# Altium PCB Control.PcbDoc
Units mm, origin at the board's own origin, x right, y up, seen from the top; angles counter-clockwise.
Board outline 100 x 50 mm, 2 copper layers (Top Layer, Bottom Layer); 89 components, 65 nets, 264 pads, 30 vias.
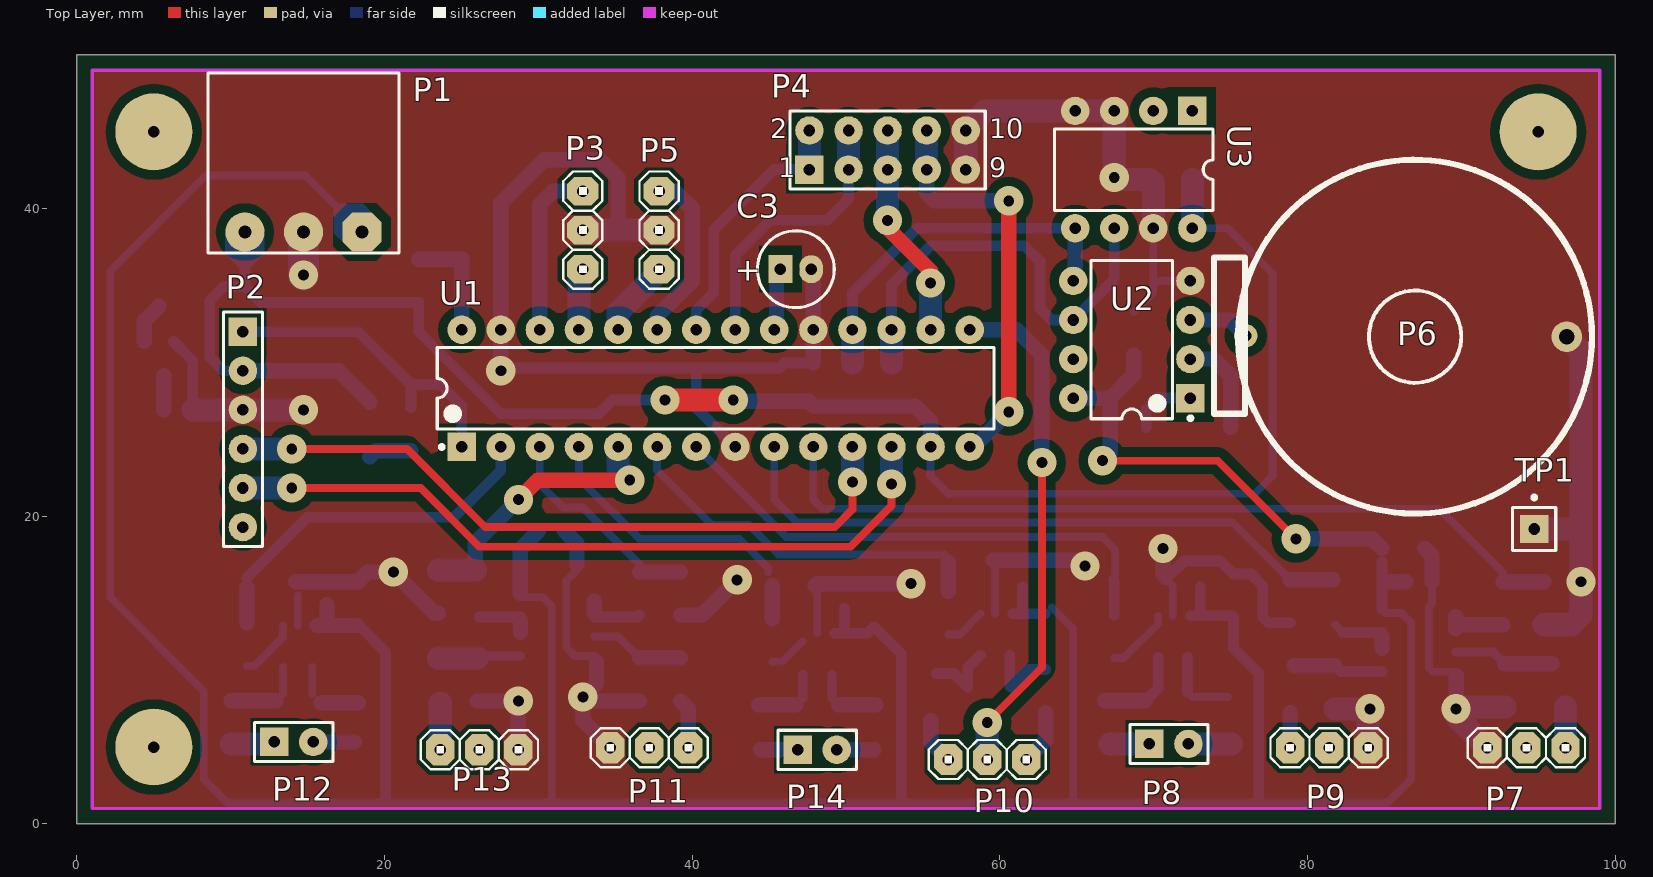
[diagram p0: Top Layer view]
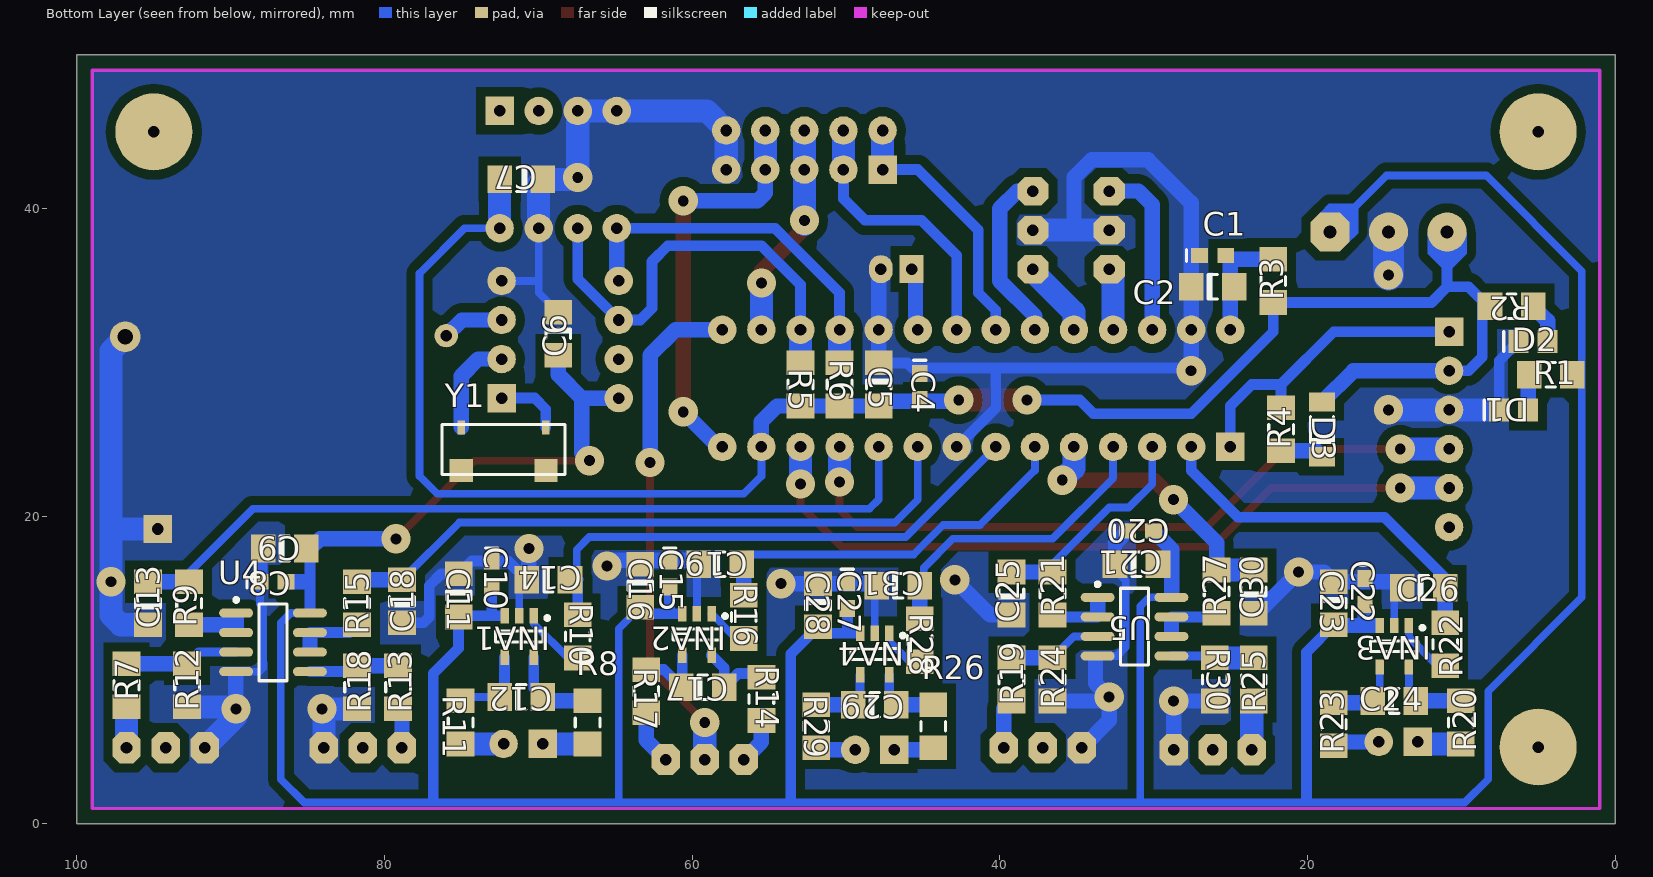
[diagram p1: Bottom Layer view, seen from below]

## Layer stack, top to bottom
Top Solder: solder mask 0.0102, Solder Resist, Dk 3.5
Top Layer: signal copper 0.0356
Dielectric 1: dielectric 0.32, FR-4, Dk 4.8
Bottom Layer: signal copper 0.0356
Bottom Solder: solder mask 0.0102, Solder Resist, Dk 3.5

## Board outline
0,0 100,0 100,50 0,50

## Design rules (kind name [scope] priority, off if disabled: settings)
Clearance "Polygon Clearance" [InPolygon AND (Not(OnLayer('Keep-Out Layer'))) vs All AND (Not(OnLayer('Keep-Out Layer')))] p1: gap=0.6
Clearance [All AND (Not(OnLayer('Keep-Out Layer'))) vs All AND (Not(OnLayer('Keep-Out Layer')))] p2: gap=0.4
ComponentClearance [All] p1 off: gap=0.5 collisioncheckmode=3 verticalgap=0.254 showdistances=TRUE
Height [All] p1: minheight=0 maxheight=15 prefheight=12.7
MinimumSolderMaskSliver SilkscreenOverComponentPads [All] p2: minsoldermaskwidth=0.254
PlaneConnect [All] p1: planeconnectstyle=Relief reliefexpansion=0.508 reliefentries=4 reliefconductorwidth=0.7 reliefairgap=0.6
PolygonConnect [All] p1: connectstyle=Direct reliefconductorwidth=1 reliefentries=4 polygonreliefangle="90 Angle" airgapwidth=0.254
RoutingVias [All] p1: holewidth=0.75 width=1.5 viastyle="Through Hole" minholewidth=0.75 minwidth=1.5 maxholewidth=1.25 maxwidth=3
SolderMaskExpansion [All] p1: expansion=0.102
Width [All] p1: maxlimit=8 minlimit=0.5 preferedwidth=1
27 further rules are at their usual default settings.

## Classes and differential pairs
component class Control: C1 C2 C3 C4 C5 C6 C7 D1 D2 D3 P1 P2 P3 P4 P5 P6 R1 R2 R3 R4 R5 R6 TP1 U1 U2 U3 Y1
component class "Remote Feedback": .7 C8 C9 C10 C11 C12 C13 C14 C15 C16 C17 C18 C19 C20 C21 C22 C23 C24 C25 C26 C27 C28 C29 C30 C31 INA1 INA2 INA3 INA4 P7 P8 P9 P10 P11 P12 P13 P14 R7 R8 R9 R10 R11 R12 R13 R14 R15 R16 R17 R18 R19 R20 R21 R22 R23 R24 R25 R26 R27 R28 R29 R30 U4 U5

## Components (designator, comment, footprint, x,y, rotation, side; value= is the part's Value field where it differs from the comment)
C1 "C0603" 0603 26.162,36.957 r180 bottom
C2 "SMD" 1206 26.162,34.925 r180 bottom
C3 "5mm Cap. 16V" B 46.736,36.068 r0 top
C4 "C0603" 0603 45.212,28.448 r270 bottom
C5 "SMD" 1206 47.879,28.575 r270 bottom
C6 "SMD" 1206 68.707,31.877 r270 bottom
C7 "SMD" 1206 71.12,41.91 r0 bottom
C8 "C0603" 0603 87.249,15.748 r180 bottom
C9 "SMD" 1206 86.487,17.907 r180 bottom
C10 "C0603" 0603 73.025,16.256 r270 bottom
C11 "SMD" 1206 75.184,14.859 r270 bottom
C12 "SMD" 1206 71.12,8.255 r180 bottom
C13 "SMD" 1206 95.377,14.351 r90 bottom
C14 "SMD" 1206 69.342,15.875 r180 bottom
C15 "C0603" 0603 61.468,16.256 r270 bottom
C16 "SMD" 1206 63.373,15.494 r270 bottom
C17 "SMD" 1206 59.309,8.89 r180 bottom
C18 "SMD" 1206 78.867,14.478 r90 bottom
C19 "SMD" 1206 58.166,16.891 r180 bottom
C20 "C0603" 0603 30.861,19.05 r180 bottom
C21 "SMD" 1206 31.115,16.891 r180 bottom
C22 "C0603" 0603 16.256,15.113 r270 bottom
C23 "SMD" 1206 18.288,14.351 r270 bottom
C24 "SMD" 1206 14.351,8.001 r180 bottom
C25 "SMD" 1206 39.243,14.986 r90 bottom
C26 "SMD" 1206 12.446,15.367 r180 bottom
C27 "C0603" 0603 49.911,14.859 r270 bottom
C28 "SMD" 1206 51.816,14.224 r270 bottom
C29 "SMD" 1206 48.133,7.747 r180 bottom
C30 "SMD" 1206 23.495,15.113 r90 bottom
C31 "SMD" 1206 46.609,15.494 r180 bottom
D1 "15-21SURC/S530-A3/TR8" 15-21SURC/S530-A3/TR8 6.604,26.924 r0 bottom
D2 "15-21SURC/S530-A3/TR8" 15-21SURC/S530-A3/TR8 5.334,31.369 r0 bottom
D3 "1N4148" SOD80C 19.05,25.654 r270 bottom
INA1 "INA196" SOT-23-5 71.247,12.192 r270 bottom
INA2 "INA196" SOT-23-5 59.69,12.319 r270 bottom
INA3 "INA196" SOT-23-5 14.351,11.557 r270 bottom
INA4 "INA196" SOT-23-5 48.133,11.049 r270 bottom
P1 "XY2500R-F 3P" "XY2500R-F 3P" 14.732,38.481 r180 top
P2 "ICSP" HDR1X6 10.795,32.004 r270 top
P3 "Header 3" My_1X03 32.893,38.608 r270 top
P4 "Interface" HDR2X5 47.625,42.545 r0 top
P5 "Header 3" My_1X03 37.846,38.608 r270 top
P6 "CR2032 Holder" "Porta Pila Boton 3V" 72.136,46.101 r270 top
P7 "Header 3" My_1X03 94.234,4.953 r0 top
P8 "Header 2" HDR1X2 69.723,5.207 r0 top
P9 "Header 3" My_1X03 81.407,4.953 r180 top
P10 "Header 3" My_1X03 59.182,4.191 r0 top
P11 "Header 3" My_1X03 37.211,4.953 r0 top
P12 "Header 2" HDR1X2 12.827,5.334 r0 top
P13 "Header 3" My_1X03 26.162,4.826 r180 top
P14 "Header 2" HDR1X2 46.863,4.826 r0 top
R1 "SMD" 8RB-1206 4.191,29.21 r0 bottom
R2 "SMD" 8RB-1206 6.731,33.655 r180 bottom
R3 "SMD 1206" 8RB-1206 22.225,35.306 r270 bottom
R4 "SMD 1206" 8RB-1206 21.717,25.654 r90 bottom
R5 "SMD 1206" 8RB-1206 52.959,28.575 r90 bottom
R6 "SMD 1206" 8RB-1206 50.419,28.575 r90 bottom
R7 "SMD" 8RB-1206 96.774,9.017 r270 bottom
R8 "SMD 1206" 8RB-1206 66.802,6.604 r90 bottom
R9 "SMD 1206" 8RB-1206 92.71,14.351 r90 bottom
R10 "SMD 1206" 8RB-1206 67.437,12.192 r90 bottom
R11 "SMD 1206" 8RB-1206 75.057,6.604 r90 bottom
R12 "SMD" 8RB-1206 92.837,9.017 r90 bottom
R13 "SMD" 8RB-1206 79.121,8.89 r270 bottom
R14 "SMD 1206" 8RB-1206 55.499,8.128 r90 bottom
R15 "SMD 1206" 8RB-1206 81.788,14.351 r90 bottom
R16 "SMD 1206" 8RB-1206 56.642,13.462 r90 bottom
R17 "SMD 1206" 8RB-1206 62.992,8.636 r90 bottom
R18 "SMD" 8RB-1206 81.788,8.89 r90 bottom
R19 "SMD" 8RB-1206 39.243,9.398 r270 bottom
R20 "SMD 1206" 8RB-1206 10.033,6.604 r90 bottom
R21 "SMD 1206" 8RB-1206 36.576,14.986 r90 bottom
R22 "SMD 1206" 8RB-1206 11.049,11.684 r90 bottom
R23 "SMD 1206" 8RB-1206 18.288,6.477 r90 bottom
R24 "SMD" 8RB-1206 36.576,9.398 r90 bottom
R25 "SMD" 8RB-1206 23.495,9.398 r270 bottom
R26 "SMD 1206" 8RB-1206 44.323,6.35 r90 bottom
R27 "SMD 1206" 8RB-1206 25.908,15.113 r90 bottom
R28 "SMD 1206" 8RB-1206 45.212,11.938 r90 bottom
R29 "SMD 1206" 8RB-1206 51.943,6.35 r90 bottom
R30 "SMD" 8RB-1206 26.035,9.398 r90 bottom
TP1 "" PIN1 94.742,19.177 r0 top
U1 "DSPIC33FJ16GS402-I/SP" SPDIP300-SP28 41.529,28.321 r90 top
U2 "DS1307" DIP8 68.58,31.496 r180 top
U3 "M24C08BN6" PSDIP8A 68.707,42.545 r180 top
U4 "MCP6002-I/SN" SOIC-SN8_N 87.249,11.811 r180 bottom
U5 "MCP6002-I/SN" SOIC-SN8_N 31.242,12.827 r180 bottom
Y1 "32.768 kHz" MC306-327680K-A0 72.263,24.384 r0 bottom

## Footprints (in the part's own frame and the unit in brackets; to place one, negate y for a bottom-side part, rotate by r counter-clockwise, add the part's x,y. Pads: shape width x height; smd on the part's side, far side on the other; paste and mask are expansions set on the pad)
8RB-1206 [mm] "Chip Resistor; Body 3.2 x 1.6 mm (LxW typ)"
  rect 1.6x1.8 smd: 1(-1.4,0) 2(1.4,0)
  silkscreen extent -0.3,-0.8 0.3,0.8
15-21SURC/S530-A3/TR8 [mm] "15-21SURC/S530-A3/TR8 led smd 0805"
  rect 1.3x1.5 smd: 1(-0.95,0) 2(0.95,0)
  silkscreen extent 1.91,-0.64 1.91,0.67
0603 [mm] "Chip Capacitor; Body 1.6 x 0.8 mm (LxW typ)"
  rect 1.1x1 smd: 1(-0.85,0) 2(0.85,0)
  silkscreen extent -1.7,-0.4 -1.7,0.4
1206 [mm] "Chip Capacitor; Body 3.2 x 1.6 mm (LxW typ)"
  rect 1.6x1.8 smd: 1(-1.4,0) 2(1.4,0)
  silkscreen extent -0.3,-0.8 0.3,0.8
B [mm] "Capacitor, Electrolytic, Radial; Body 5 x 6.8 mm (Dia.xH typ); Pin Spacing 2 mm (typ)"
  rect 1.55x1.825 hole 0.75: 1(-1,0)
  oval 1.55x1.825 hole 0.75: 2(1,0)
  silkscreen extent -2.5,-2.5 2.5,2.5
DIP8 [mm] "DIP, 8-Leads, Row Spacing 7.62mm, Pitch 2.54mm, Body 9.65x6.35mm"
  rect 1.85x1.85 hole 0.75: 1(-3.81,3.81)
  round 1.85 hole 0.75: 2(-3.81,1.27) 3(-3.81,-1.27) 4(-3.81,-3.81) 5(3.81,-3.81) 6(3.81,-1.27) 7(3.81,1.27) 8(3.81,3.81)
  silkscreen extent -3.94,-5.15 2.65,5.23, body extent -3.6,-5.15 3.6,5.15, height 4.42
HDR1X2 [mm] "Connector; Header; 2 Position"
  rect 1.85x1.85 hole 0.75: 1(0,0)
  round 1.85 hole 0.75: 2(2.54,0)
  silkscreen extent -1.27,-1.27 3.81,1.27
HDR1X6 [mm] "Connector; Header; 6 Position"
  rect 1.85x1.85 hole 0.75: 1(0,0)
  round 1.85 hole 0.75: 2(2.54,0) 3(5.08,0) 4(7.62,0) 5(10.16,0) 6(12.7,0)
  silkscreen extent -1.27,-1.27 13.97,1.27
HDR2X5 [mm] "Connector; Header; 5x2 Position"
  rect 1.85x1.85 hole 0.75: 1(0,0)
  round 1.85 hole 0.75: 2(0,2.54) 3(2.54,0) 4(2.54,2.54) 5(5.08,0) 6(5.08,2.54) 7(7.62,0) 8(7.62,2.54) 9(10.16,0) 10(10.16,2.54)
  silkscreen extent -1.27,-1.27 11.43,3.81
MC306-327680K-A0 [mm] "MC306-327680K-A0 - XTAL 32.768 KHZ 12.5pF+-20PPM -20+70ºC SMD"
  rect 0.5x0.9 smd: 1(-2.75,-1.4) 2(2.75,-1.4)
  rect 1.5x1.5 smd: 3(2.75,1.4) 4(-2.75,1.4)
  silkscreen extent -4,-1.6 4,1.65
My_1X03 [mm]
  oct 1.85x2.032 hole 0.75: 1(-2.54,0) 2(0,0) 3(2.54,0)
  silkscreen extent -3.81,-1.27 3.81,1.27
PIN1 [mm] "Connector; Plug"
  rect 1.85x1.85 hole 0.75: 1(0,0)
  silkscreen extent -1.4,-1.4 1.4,2.17
"Porta Pila Boton 3V" [mil] "Porta pila para pilas tipo boton de 25mm"
  round 60 hole 30: +(565,151.93)
  round 78.74 hole 39.37: -(567.76,973.19)
  silkscreen extent 115,70 1020,1038
PSDIP8A [mm] "DIP; 8 Leads; Row Spacing 7.62 mm; Pitch 2.54 mm"
  rect 1.85x1.85 hole 0.75: 1(-3.81,-3.81)
  round 1.85 hole 0.75: 2(-1.27,-3.81) 3(1.27,-3.81) 4(3.81,-3.81) 5(3.81,3.81) 6(1.27,3.81) 7(-1.27,3.81) 8(-3.81,3.81)
  silkscreen extent -5.15,-2.65 5.15,2.65
SOD80C [mm] "Metal Electrode Face (MELF) Diode; Body 3.5 x 1.6 mm (LxDia)"
  rect 1.25x1.7 smd: 1(-1.775,0) 2(1.775,0)
  silkscreen extent -0.85,-0.75 0.85,0.75
SOIC-SN8_N [mm] "SOIC, 8-Leads, Body 4.9x3.8mm, Pitch 1.27mm, IPC Medium Density"
  oval 2.2x0.6 smd: 1(-2.4,1.905) 2(-2.4,0.635) 3(-2.4,-0.635) 4(-2.4,-1.905) 5(2.4,-1.905) 6(2.4,-0.635) 7(2.4,0.635) 8(2.4,1.905)
  silkscreen extent -2.53,-2.5 0.9,2.88, body extent -2,-2.5 2,2.5, height 1.75
SOT-23-5 [mm] "SOT23, 5-Leads, Body 2.9x1.7mm, Pitch 0.95mm, Lead Span 2.8mm, IPC High Density"
  rect 1x0.55 smd: 1(-1.35,0.95) 2(-1.35,0) 3(-1.35,-0.95) 4(1.35,-0.95) 5(1.35,0.95)
  silkscreen extent -1.32,-1.55 0.35,1.95, body extent -0.9,-1.55 0.9,1.55, height 1.45
SPDIP300-SP28 [mm] "DIP, 28-Leads, Row Spacing 7.62mm, Pitch 2.54mm, Body 34.9x6.8mm"
  rect 1.85x1.85 hole 0.75: 1(-3.81,16.51)
  round 1.85 hole 0.75: 2(-3.81,13.97) 3(-3.81,11.43) 4(-3.81,8.89) 5(-3.81,6.35) 6(-3.81,3.81) 7(-3.81,1.27) 8(-3.81,-1.27) 9(-3.81,-3.81) 10(-3.81,-6.35) 11(-3.81,-8.89) 12(-3.81,-11.43) 13(-3.81,-13.97) 14(-3.81,-16.51) 15(3.81,-16.51) 16(3.81,-13.97) 17(3.81,-11.43) 18(3.81,-8.89) 19(3.81,-6.35) 20(3.81,-3.81) 21(3.81,-1.27) 22(3.81,1.27) 23(3.81,3.81) 24(3.81,6.35) 25(3.81,8.89) 26(3.81,11.43) 27(3.81,13.97) 28(3.81,16.51)
  silkscreen extent -3.93,-18.1 2.65,18.1, body extent -3.55,-18.1 3.55,18.1, height 5.08
"XY2500R-F 3P" [mm] "XY2500R-F 3P"
  oct 2.54x2.54 hole 0.85: 1(-3.81,0)
  round 2.54 hole 0.85: 2(0,0) 3(3.81,0)
  silkscreen extent -6.21,-10.35 6.21,1.35

## Part data
C1 C4 C8 C10 C15 C20 C22 C27: "C1608X7R1C105K X7R"
C2 C5 C6 C7 C9 C11 C12 C13 C14 C16 C17 C18 C19 C21 C23 C24 C25 C26 C28 C29 C30 C31: library part C1206, "Ceramic Chip Capacitor - Standard"
C3: library part 94SC106X0010BBP, "Solid Aluminum Capacitor with Organic Semiconductor Electrolyte: 10uF, 10V, Bulk Pack"
D1 D2: library part "15-21SURC/S530-A3/TR8 led smd 0805 red", "15-21SURC/S530-A3/TR8 led smd 0805 red"
D3: "High Conductance Fast Diode"
INA1 INA2 INA3 INA4: "Current Shunt Monitor -16 V to +80 V Common-Mode Range"
P1: "HEADER 3P P/CI 90gra VERDE P=3.81MM XY2500R-F"
P2: library part "Header 6", "Header, 6-Pin"
P3 P5 P7 P9 P10 P11 P13: "Header, 3-Pin"
P4: library part "Header 5X2", "Header, 5-Pin, Dual row"
P6: library part "Porta pila 25mm"
P8 P12 P14: "Header, 2-Pin"
R1 R2 R3 R4 R5 R6 R7 R8 R9 R10 R11 R12 R13 R14 R15 R16 R17 R18 R19 R20 R21 R22 R23 R24 R25 R26 R27 R28 R29 R30: library part ERJ8BQ, "Low Ohmic Value Thick Film Chip Resistor, 0.22 Ohm to 9.1 Ohm Range, 1%, 2% and 5% Tolerance, 1206 Size, 0.33 W"
TP1: library part Plug, "Plug"
U1: "High-Performance 16-bit Digital Signal Controller, 16 KB Flash, 2 KB RAM , 28-Pin SPDIP, Industrial Temperature"
U2: "64 X 8 Serial Real-Time Clock"
U3: "8Kbit Serial I²C Bus EEPROM"
U4 U5: "1 MHz, Low-Power Operational Amplifier, 8-Pin SOIC, Industrial Temperature"
Y1: library part MC306-327680K-A0, "MC306-327680K-A0 - XTAL 32.768 KHZ 12.5pF+-20PPM -20+70ºC SMD"

## Free pads (board coordinates)
  round 5 hole 0.75: 0(5,5) 0(5,45) 0(95,45)

## Via types
v1: diameter 1.9, hole 0.711, Top Layer to Bottom Layer, 30 vias

## Nets (pads, with @x,y where several pads share a name; then routed paths per layer and width w, separated by ;. In a path a pad name is that pad's centre, name@x,y a point inside that pad or via, vN(x,y) a via of type N, cw(c..) or ccw(c..) an arc to the next point about the centre after c; other vN are vias at no path point)
3V3_SENSE_NEG: P8.1 R8.1 | length 2.5
  Bottom Layer w1.5: R8.1@67.18,5.207 P8.1
3V3_SENSE_POS: P8.2 R11.1 | length 2.8
  Bottom Layer w1.5: P8.2@72.266,5.204 R11.1
3V3FEEDBACK: C13.2 R9.2 U1.10 | length 53.5
  Bottom Layer w0.5: U1.10 47.879,21.093 48.477,20.495 88.553,20.495 92.71,16.338 R9.2
  Bottom Layer w1: R9.2 C13.2
5V_CTRL: P10.2 U1.15 | length 33.1
  Top Layer w0.5: v1(59.182,6.604) 62.738,10.16 v1(62.738,23.495)
  Bottom Layer w1: U1.15 61.087,32.131 62.738,30.48 v1(62.738,23.495)
  Bottom Layer w1.5: P10.2 v1(59.182,6.604)
5V_SENSE_NEG: P10.1 R14.1 | length 3
  Bottom Layer w1: R14.1 55.499,5.334 P10.1
5V_SENSE_POS: P10.3 R17.1 | length 3.6
  Bottom Layer w1: P10.3 62.992,5.461 R17.1
5VFEEDBACK: C18.2 R15.2 U1.9 | length 41.9
  Bottom Layer w0.5: U1.9 45.339,21.082 46.826,19.595 75.15,19.595 C18.2
  Bottom Layer w1: C18.2 R15.2@81.661,15.878
+3V3: C4.2 C5.2 C7.2 D3.1 P1.3 P2.2 R2.1 R3.2 R5.1 R6.1 U1.13 U3.8 | length 121.4
  Top Layer w0.5: v1(38.227,27.559) v1@38.481,27.813
  Top Layer w1.5: v1@38.735,27.559 v1(42.672,27.559)
  Bottom Layer w0.5: v1@42.291,27.686 v1@42.506,27.471 ; U1.13 55.499,22.606 56.642,21.463 76.581,21.463 77.724,22.606 77.724,35.814 74.803,38.735 U3.8 U3.8@72.52,38.738
  Bottom Layer w0.7: P2.2 9.525,29.464 8.636,30.353 8.636,34.036 9.525,34.925 10.922,34.925 ; P1.3 10.922,34.925 ; v1(38.227,27.559) 34.798,27.559 33.909,26.67 27.559,26.67 22.225,32.004 R3.2 11.941,33.906 10.922,34.925
  Bottom Layer w1: P2.2 17.015,29.464 D3.1 ; v1@42.506,27.471 47.583,27.471 C5.2 R6.1 54.486,27.175 55.499,26.162 U1.13
  Bottom Layer w1.5: U3.8@72.52,38.738 C7.2
+3V3_OUT: P7.3 R7.2 | length 2.7
  Bottom Layer w1.5: P7.3 R7.2
+5V: C6.2 C8.2 C9.2 C10.2 C11.2 C15.2 C16.2 C20.2 C21.2 C22.2 C23.2 C27.2 C28.2 INA1.3 INA2.3 INA3.3 INA4.3 P1.1 R1.1 U2.8 U4.8 U5.8 | length 268.2
  Top Layer w0.5: v1(66.675,23.622) 74.168,23.622 v1(79.248,18.542)
  Bottom Layer w0.5: P1.1 14.859,42.164 8.382,42.164 2.159,35.941 2.159,14.732 8.255,8.636 8.255,2.921 9.779,1.397 30.734,1.397 64.643,1.397 ; U5.8 30.279,14.732 30.861,14.15 30.861,1.651 ; C16.2 64.77,12.697 64.77,1.524 64.643,1.397 ; v1(66.675,23.622) v1@67.183,24.13 ; U4.8@85.09,13.716 86.106,13.716 86.741,13.081 86.741,2.921 85.217,1.397 64.643,1.397
  Bottom Layer w0.7: C23.2 20.066,11.173 20.066,1.651 ; INA4.3@49.276,12.399 51.391,12.399 C28.2 53.594,11.046 53.594,1.651 ; 49.911,12.526 C27.2 ; INA2.3@60.833,13.669 C16.2@62.948,13.669 ; 61.468,13.923 C15.2 ; INA1.3@72.39,13.542 73.025,13.542 ; C10.2 73.025,13.542 ; C11.2@75.101,13.542 73.025,13.542 ; C11.2 75.184,11.43 76.835,9.779 76.835,1.651 ; U4.8@84.849,13.957 C9.2@84.849,17.034
  Bottom Layer w1: 15.621,12.907 C23.2@18.244,12.907 ; 16.256,13.161 C22.2 ; U5.8@28.829,14.986 28.829,17.868 C20.2 ; U2.8 67.183,27.686 ; v1@67.183,24.13 67.183,27.686 ; C6.2 68.707,29.21 67.183,27.686 ; v1(79.248,18.542) 84.198,18.542 C9.2@84.833,17.907 ; 84.976,15.748 C8.2
+5V_OUT: P9.3 R13.2 | length 2.3
  Bottom Layer w1: P9.3 R13.2@78.867,7.236
BUCK1FEEDBACK: C25.2 R21.2 U1.3 | length 14.2
  Bottom Layer w0.5: U1.3 30.099,22.098 31.623,20.574 32.893,20.574 36.576,16.891 R21.2
  Bottom Layer w1: R21.2 C25.2
BUCK2FEEDBACK: C30.2 R27.2 U1.5 | length 18.4
  Top Layer w1: v1(28.702,21.082) 29.972,22.352 v1(35.941,22.352)
  Bottom Layer w1: R27.2 25.908,18.288 v1(28.702,21.082)
  Bottom Layer w1.5: C30.2 R27.2 ; U1.5 35.179,23.114 v1(35.941,22.352)
CURRENT3V3: C14.2 R10.2 U1.7 | length 34.2
  Bottom Layer w0.5: U1.7 46.112,18.658 66.686,18.658 67.513,17.831 67.513,16.101 67.307,15.895 C14.2@67.307,15.875
  Bottom Layer w0.7: R10.2 C14.2@67.437,15.745
CURRENT5V: C19.2 R16.2 U1.6 | length 24.9
  Bottom Layer w0.5: U1.6 37.719,22.987 41.264,19.442 43.68,19.442 45.596,17.526 56.385,17.526 C19.2@56.766,17.145
  Bottom Layer w1: R16.2@56.642,15.116 C19.2@56.642,17.021
CURRENTBUCK1: C26.2 R22.2 U1.2 | length 23.8
  Bottom Layer w0.5: C26.2 C26.2@11.046,15.999
  Bottom Layer w0.7: C26.2@11.046,15.999 14.986,19.939 24.511,19.939 27.559,22.987 U1.2
  Bottom Layer w1: R22.2@11.046,13.087 C26.2
CURRENTBUCK2: C31.2 R28.2 U1.4 | length 19.2
  Bottom Layer w0.5: U1.4 32.639,22.479 36.576,18.542 43.053,18.542 44.955,16.64 C31.2@44.955,16.386
  Bottom Layer w1: R28.2@45.209,13.341 C31.2
FAULT: P4.5 P4.6 U1.16 | length 14.4
  Top Layer w1: v1(52.705,39.243) 52.705,38.735 55.499,35.941 v1(55.499,35.179)
  Bottom Layer w1.5: v1@52.705,38.989 v1(52.705,39.243) P4.5 P4.6 ; U1.16 v1(55.499,35.179)
GATE1_BUCK1_PIC: P3.1 U1.26 | length 11.3
  Bottom Layer w1: U1.26 30.099,40.259 30.988,41.148 P3.1
GATE1_BUCK2_PIC: P5.1 U1.23 | length 11.5
  Bottom Layer w1: U1.23 37.719,33.02 40.005,35.306 40.005,40.005 38.862,41.148 P5.1
GATE2_BUCK1_PIC: P3.3 U1.25 | length 3.7
  Bottom Layer w1.5: U1.25 P3.3@32.639,35.814
GATE2_BUCK2_PIC: P5.3 U1.24 | length 5.3
  Bottom Layer w0.5: P5.3@37.846,35.941 P5.3@38.1,36.195
  Bottom Layer w1.5: U1.24 35.179,33.274 P5.3@37.846,35.941
GND: C1.1 C2.1 C3.2 C4.1 C5.1 C6.1 C7.1 C8.1 C9.1 C10.1 C11.1 C13.1 C14.1 C15.1 C16.1 C18.1 C19.1 C20.1 C21.1 C22.1 C23.1 C25.1 C26.1 C27.1 C28.1 C30.1 C31.1 D1.2 D2.2 INA1.2 INA2.2 INA3.2 INA4.2 P1.2 P2.3 P3.2 P4.9 P4.10 P5.2 P6.- P7.1 P9.1 P11.1 P13.1 R12.1 R18.1 R24.1 R30.1 TP1.1 U1.8 U1.19 U1.27 U2.4 U3.3 U3.4 U3.7 U4.4 U5.4 | length 236.1
  Top Layer w0.5: v1@53.975,15.875 v1(54.229,15.621)
  Bottom Layer w0.5: INA3.2 C26.1@14.351,14.862 ; C21.1 32.515,16.513 31.813,15.811 31.813,11.493 32.385,10.922 U5.4 ; P3.2 33.02,38.481 35.179,38.481 ; P5.2@37.719,38.481 P5.2@37.846,38.481 ; C5.1@47.371,29.975 C5.1 ; C31.1 48.133,15.37 INA4.2 ; INA2.2 C19.1@59.69,17.021 ; C6.1 69.977,34.547 69.977,35.306 ; U3.7 69.977,35.306 ; C14.1@70.612,16.256 70.612,16.005 C14.1 ; C14.1@70.866,15.875 71.247,15.494 INA1.2 ; C14.1@70.929,15.938 72.097,17.106 ; U2.4 69.977,35.306 ; C8.1 88.099,14.309 87.899,14.11 87.899,10.145 88.138,9.906 U4.4
  Bottom Layer w0.7: D2.2 7.536,30.117 7.536,26.924 D1.2 ; v1(27.559,29.464) 27.735,29.64 45.681,29.64 46.016,29.975 C5.1@47.371,29.975 ; 40.259,29.337 40.259,27.051 U1.8 ; C14.1 71.973,17.106 72.097,17.106 C10.1 74.337,17.106 C11.1 76.324,16.259 77.089,15.494 77.089,13.462 77.473,13.078 C18.1
  Bottom Layer w1: C26.1@14.23,15.751 C23.1 18.92,16.383 v1(20.574,16.383) 23.244,13.713 C30.1 ; R30.1 v1(28.699,7.998) ; v1(27.559,29.464) U1.27 27.559,40.386 30.353,43.18 34.036,43.18 35.179,42.037 35.179,38.608 ; P13.1 v1@28.702,8.001 ; C20.1 32.515,18.246 C21.1 ; v1@33.15,7.998 R24.1 ; 33.782,10.541 33.782,9.144 v1(32.893,8.255) 32.893,6.731 P11.1 ; C25.1 40.637,13.586 v1(42.926,15.875) ; C3.2@47.482,36.068 47.879,35.671 U1.19 C5.1 ; C31.1 48.136,15.621 v1(54.229,15.621) ; C19.1@59.566,17.145 65.151,17.145 v1(65.532,16.764) ; C7.1 C7.1@69.977,41.653 ; C14.1@70.612,16.256 v1(70.612,17.907) ; C9.1@87.633,17.907 88.099,17.441 C8.1 ; v1(89.662,7.49) U4.4@89.662,9.652
  Bottom Layer w1.5: D1.2 P2.3 v1(14.732,26.924) ; P3.2 35.179,38.608 P5.2@37.719,38.608 ; P4.9 P4.10 59.055,46.355 U3.4 U3.3 v1@67.437,42.672 ; v1@67.564,41.91 C7.1 ; U3.7 C7.1@69.977,41.653 ; R18.1 v1(84.074,7.49) ; P9.1 v1@83.947,7.363 ; v1(89.662,7.49) 89.662,6.985 P7.1 ; v1@89.789,7.617 R12.1 ; TP1.1 97.409,19.177 ; C13.1 97.152,12.951 97.79,13.589 v1(97.79,15.748) 97.79,30.745 P6.-
  Bottom Layer w2: v1(14.732,35.687) P1.2
  other v1: 67.437,42.037
M\C\L\R\: P2.1 R4.2 U1.1 | length 20.4
  Bottom Layer w0.7: P2.1 18.288,32.004 21.717,28.575 ; R4.2 21.717,28.575 ; U1.1 25.019,27.178 23.622,28.575 21.717,28.575
NetC1_2: C1.2 C2.2 R3.1 U1.28 | length 7.4
  Bottom Layer w1: R3.1 25.061,36.706 25.019,36.664 U1.28
NetC3_1: C3.1 U1.20 | length 3.8
  Bottom Layer w1: U1.20@45.482,32.274 C3.1@45.482,36.068
NetC12_1: C12.1 INA1.4 R11.2 | length 4.5
  Bottom Layer w0.5: C12.1 R11.2@74.806,8.255
  Bottom Layer w0.7: C12.1@72.197,8.578 INA1.4
NetC12_2: C12.2 INA1.5 R8.2 | length 5.5
  Bottom Layer w0.7: C12.2 70.297,8.832 INA1.5
  Bottom Layer w1: R8.2 C12.2@69.469,8.004
NetC17_1: C17.1 INA2.4 R17.2 | length 4.8
  Bottom Layer w0.7: C17.1@60.64,8.959 INA2.4 ; C17.1 61.855,10.036 R17.2
NetC17_2: C17.2 INA2.5 R14.2 | length 4.8
  Bottom Layer w0.7: R14.2@55.883,9.779 57.02,9.779 C17.2 57.909,10.138 INA2.5
NetC24_1: C24.1 INA3.4 R23.2 | length 4.2
  Bottom Layer w0.5: C24.1@15.301,8.451 INA3.4
  Bottom Layer w1: C24.1@15.875,7.877 R23.2
NetC24_2: C24.2 INA3.5 R20.2 | length 4.7
  Bottom Layer w0.5: C24.2@13.401,8.451 INA3.5
  Bottom Layer w1: R20.2 C24.2@12.948,8.004
NetC29_1: C29.1 INA4.4 R29.2 | length 3.9
  Bottom Layer w0.6: C29.1@49.083,8.197 INA4.4
  Bottom Layer w1: C29.1@49.536,7.75 R29.2
NetC29_2: C29.2 INA4.5 R26.2 | length 3.9
  Bottom Layer w0.6: C29.2@47.183,8.203 INA4.5
  Bottom Layer w1: R26.2 C29.2@46.73,7.75
NetD1_1: D1.1 R1.2 | length 2.2
  Bottom Layer w1: D1.1 R1.2@5.654,29.147
NetD2_1: D2.1 R2.2 | length 2.7
  Bottom Layer w1: D2.1 4.384,32.708 R2.2
NetD3_2: D3.2 R4.1 | length 2.8
  Bottom Layer w1: D3.2 19.425,24.254 R4.1
NetINA1_1: INA1.1 R10.1 | length 4.3
  Bottom Layer w0.5: R10.1 68.069,10.792 70.297,13.02 INA1.1
NetINA2_1: INA2.1 R16.1 | length 2.7
  Bottom Layer w0.5: R16.1@56.642,12.316 57.387,12.316 INA2.1
NetINA3_1: INA3.1 R22.1 | length 3.9
  Bottom Layer w0.5: R22.1 11.554,10.284 13.401,12.131 INA3.1
NetINA4_1: INA4.1 R28.1 | length 2.5
  Bottom Layer w0.5: R28.1 45.844,10.538 47.183,11.877
NetP2_4: P2.4 U1.11 | length 46.3
  Top Layer w0.5: v1(13.97,24.384) 21.463,24.384 26.543,19.304 49.276,19.304 50.419,20.447 v1(50.419,22.225)
  Bottom Layer w1.5: P2.4 v1(13.97,24.384) ; v1(50.419,22.225) U1.11
NetP2_5: P2.5 U1.12 | length 48.8
  Top Layer w0.5: v1(13.97,21.844) 22.352,21.844 26.162,18.034 50.292,18.034 52.959,20.701 v1(52.959,22.098)
  Bottom Layer w0.5: v1(13.97,21.844) v1@14.097,21.717
  Bottom Layer w1.5: P2.5 v1(13.97,21.844) ; v1(52.959,22.098) U1.12
NetP6_+: P6.+ U2.3 | length 4
  Bottom Layer w1: U2.3 74.979,32.766 P6.+
NetR7_1: R7.1 R12.2 U4.3 | length 6.6
  Bottom Layer w0.6: U4.3 92.078,11.176 R12.2
  Bottom Layer w1: R12.2 R7.1@95.885,10.417
NetR9_1: R9.1 U4.1 U4.2 | length 3.8
  Bottom Layer w1: U4.2@89.649,12.7 U4.1@89.649,13.462 ; 89.652,12.951 R9.1
NetR13_1: R13.1 R18.2 U4.5 | length 5.3
  Bottom Layer w0.7: R18.2@82.172,9.906 U4.5
  Bottom Layer w1: R13.1 R18.2
NetR15_1: R15.1 U4.6 U4.7 | length 4
  Bottom Layer w0.5: R15.1 R15.1@82.293,12.446
  Bottom Layer w0.7: R15.1@82.293,12.446 U4.7
  Bottom Layer w1: U4.6@84.849,11.43 U4.7@84.849,12.192
NetR19_1: R19.1 R24.2 U5.3 | length 6.2
  Bottom Layer w0.5: U5.3 35.182,12.192 R24.2
  Bottom Layer w1: R24.2 R19.1
NetR21_1: R21.1 U5.1 U5.2 | length 3.7
  Bottom Layer w0.7: U5.2 36.452,13.462 R21.1
  Bottom Layer w1: U5.2@33.642,13.716 U5.1@33.642,14.478
NetR25_1: R25.1 R30.2 U5.5 | length 5.4
  Bottom Layer w0.6: R30.2 26.159,10.922 U5.5
  Bottom Layer w1.5: R25.1 R30.2
NetR27_1: R27.1 U5.6 U5.7 | length 3.4
  Bottom Layer w0.7: R27.1@26.159,13.462 U5.7
  Bottom Layer w1: U5.6@28.842,12.446 U5.7@28.842,13.208
NetU2_1: U2.1 Y1.1 | length 4.4
  Bottom Layer w0.7: Y1.1 69.513,26.968 70.231,27.686 U2.1
NetU2_2: U2.2 Y1.2 | length 6.4
  Bottom Layer w1: U2.2 73.914,30.226 75.013,29.127 Y1.2
OUT1_SENSE_NEG: P12.1 R20.1 | length 2.7
  Bottom Layer w1.5: R20.1 P12.1@12.697,5.204
OUT1_SENSE_POS: P12.2 R23.1 | length 2.7
  Bottom Layer w1: P12.2 R23.1@18.031,5.334
OUT2_SENSE_NEG: P14.1 R26.1 | length 2.4
  Bottom Layer w1: R26.1@44.447,4.826 P14.1
OUT2_SENSE_POS: P14.2 R29.1 | length 2.4
  Bottom Layer w1: P14.2 R29.1@51.819,4.826
OUT_BUCK_1: P11.3 R19.2 | length 3.3
  Bottom Layer w1: R19.2 39.751,7.49 P11.3
OUT_BUCK_2: P13.3 R25.2 | length 3
  Bottom Layer w1.5: P13.3 R25.2@23.622,7.871
PWR_GOOD: P4.7 P4.8 U1.14 | length 26.8
  Top Layer w1: v1(60.579,26.797) v1(60.579,40.513)
  Bottom Layer w0.5: U1.14 U1.14@58.293,24.511
  Bottom Layer w1: P4.7 55.245,41.021 55.753,40.513 v1(60.579,40.513) ; U1.14@58.293,24.511 v1(60.579,26.797)
  Bottom Layer w1.5: P4.7 P4.8
RX: P4.1 P4.2 U1.22 | length 17.3
  Bottom Layer w0.7: U1.22 40.259,33.401 41.402,34.544 41.402,38.608 45.339,42.545 P4.1
  Bottom Layer w1.5: P4.1 P4.2
SCL: R5.2 U1.17 U2.6 U3.6 | length 28.8
  Bottom Layer w0.7: U1.17 52.959,35.052 55.499,37.592 61.595,37.592 62.611,36.576 62.611,33.528 63.373,32.766 U2.6 67.437,35.433 U3.6
  Bottom Layer w1.5: R5.2 U1.17
SDA: R6.2 U1.18 U2.5 U3.5 | length 24.3
  Bottom Layer w0.5: U2.5 U2.5@64.897,35.433
  Bottom Layer w0.7: U1.18 50.419,34.544 54.61,38.735 U3.5
  Bottom Layer w1: U2.5@64.897,35.433 U3.5
  Bottom Layer w1.5: R6.2 U1.18
TX: P4.3 P4.4 U1.21 | length 18.2
  Bottom Layer w0.7: U1.21 42.799,36.957 45.085,39.243 48.768,39.243 50.165,40.64 P4.3
  Bottom Layer w1.5: P4.3 P4.4
pads on no net: P2.6 P7.2 P9.2 P11.2 P13.2 U2.7 U3.1 U3.2 Y1.3 Y1.4

## Polygon pours and split planes (outlines as drawn)
GND on Top Layer "Mechanical 1-No Net" (solid, remove dead copper, pour order 4): 1,49 99,49 99,1 1,1
GND on Bottom Layer "Mechanical 1-No Net" (solid, remove dead copper, pour order 3): 1,49 99,49 99,1 1,1

## Keep-outs
Keep-Out Layer:
  lines w0.2: 1,1 1,49 99,49 99,1 1,1

## Other copper
Bottom Layer:
  region net +3V3: 9.652,38.481 9.652,37.084 10.922,35.814 12.192,37.084 12.192,38.481
  region net +5V: 17.399,37.719 16.7,38.417 16.7,40.322 18.605,40.322 19.177,39.751

## Dimensions
1,1 to 1,49 on Mechanical 1
1,1 to 99,1 on Mechanical 1

## Text inside footprints (layer, text, board x,y; h text height)
C3: Top Overlay "+" at 42.761,35.318 h1.5
P4: Top Overlay "2" at 45.085,44.577 h1.27; Top Overlay "1" at 45.593,42.037 h1.27; Top Overlay "9" at 59.309,42.037 h1.27; Top Overlay "10" at 59.309,44.577 h1.27